# EAGLE board PCB (EAGLE 9.7.0)
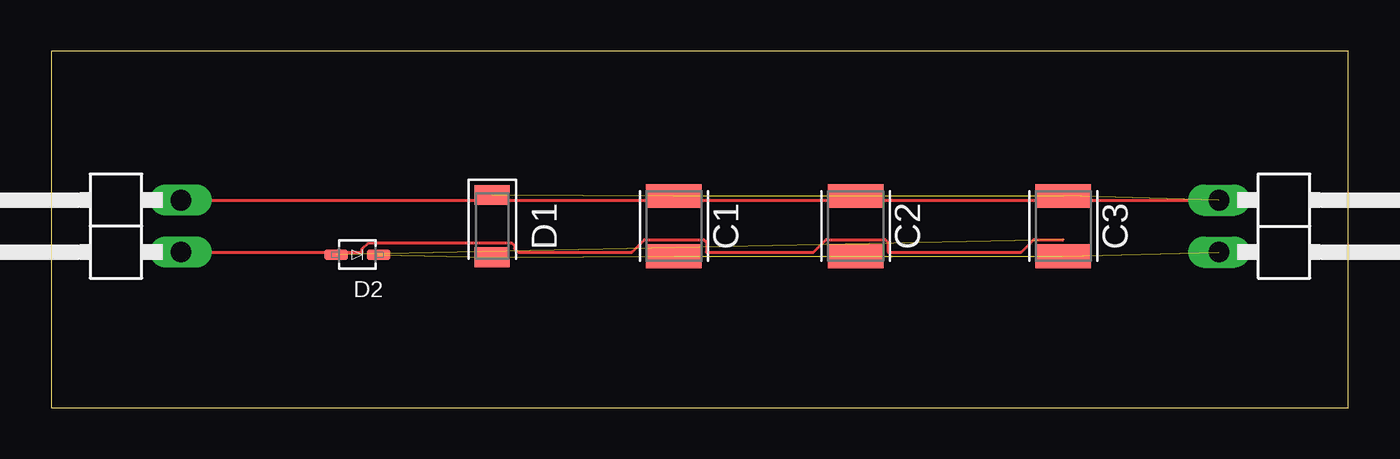
[diagram p0: board, top side]

Size 63.48 x 17.45 mm. Coordinates in mm from the lower left corner, seen from the top.
Outline: 0,0 63.48,0 63.48,17.45 0,17.45 0,0
Copper layers (1*16): Top / Bottom
Stack-up Default Layer Stack: Top SilkScreen Epoxy Ink / Top SolderMask SR:Green 0.0254mm Dk 4.3 / Top Surface Finish Lead-Free 0.02mm / Top CuFoil:007 0.035mm / Dielectric-1 User Defined 1.5mm / Bottom CuFoil:007 0.035mm / Bottom Surface Finish Lead-Free 0.02mm / Bottom SolderMask SR:Green 0.0254mm Dk 4.3 / Bottom SilkScreen Epoxy Ink
Design rules: minimum copper width 6mil, minimum drill size 0.35mm, copper clearance wire_polygon to wire_polygon 6mil, copper clearance wire_polygon to pad_smd 6mil, copper clearance wire_polygon to via 6mil, copper clearance pad_smd to pad_smd 6mil, copper clearance pad_smd to via 6mil, copper clearance via to via 6mil, copper clearance smd to pad (same net) 6mil, copper clearance smd to via (same net) 6mil, copper clearance smd to smd (same net) 6mil, dimension clearance 40mil, restrict clearance 0mil, via restrict clearance 0mil, drill distance 6mil, keepout clearance 0mil

## Footprints (pad centres in the part's own frame; a part is rotated, then mirrored left to right if it is on the bottom)
CAPC3225X135 = smd 1.165 x 2.715: 1 -1.475,0; 2 1.475,0
LEDC3216X110N_R = smd 0.962 x 1.712: 1 -1.525,0; 2 1.525,0
SOD-323 = smd 1.14 x 0.52: A 1.04,0; C -1.04,0
1X02/90 = drill 1.016 long: 1 -1.27,-3.81; 2 1.27,-3.81

## Placement (x,y rotation side)
C1  4.7u  [CAPC3225X135]  30.48,8.89 270 top
C2  4.7u  [CAPC3225X135]  39.37,8.89 270 top
C3  4.7u  [CAPC3225X135]  49.53,8.89 270 top
D1  LED_CHIPRED-3216  [LEDC3216X110N_R]  21.59,8.89 270 top
D2  1N4148WS  [SOD-323]  14.99,7.49 180 top
INPUT  PINHD-1X2/90  [1X02/90]  2.54,8.89 90 top
OUTPUT  PINHD-1X2/90  [1X02/90]  60.96,8.89 270 top

## Library data of the parts
C1-C3 = Capacitor; CATEGORY: Capacitor; PACKAGE_SIZE: 1210; PACKAGE_TYPE: Surface Mount; SUBCATEGORY: Ceramic Capacitors; TYPE: MLCC
D1 = Opto-Electronic; CATEGORY: Optoelectronics; COLOR: Red; DESCRIPTION: Chip LED Red 3216 (METRIC) Package 3.20 X 1.60 X 1.10 mm body; PACKAGE_SIZE: 3216 (METRIC); PACKAGE_TYPE: Surface Mount; SUBCATEGORY: LED; TYPE: Chip
D2 = Diodes; CREATED_BY: PCBLayout.com; DIGIKEY_PART_NUMBER: 1N4148WSFSTR-ND; MANUFACTURER: Diodes Incorporated; MPN: 1N4148WS; PACKAGE: SOD-323
INPUT OUTPUT = Connector; CATEGORY: Connectors; DESCRIPTION: Header-Right Angle-2 Position; PACKAGE_TYPE: Through Hole; PITCH: 0.100" (2.54mm); SUBCATEGORY: Headers; TYPE: Male Pins

## Nets
N$1: D2.A INPUT.1
N$2: C1.2 C2.2 C3.2 D1.2 D2.C OUTPUT.2
N$3: C1.1 C2.1 C3.1 D1.1 INPUT.2 OUTPUT.1

## Tracks (layer width: path | path; a pad name or v marks a point on that pad's centre or on a via)
N$1  (1 unrouted)
  Top 0.152: INPUT.1 15.23,7.62 15.23,7.77 15.53,8.07 22.54,8.07 22.68,7.94 22.68,7.8 22.86,7.62 28.42,7.62 29.03,8.23 31.93,8.23 32.07,8.09 32.07,7.62 37.31,7.62 37.92,8.23 40.82,8.23 40.96,8.09 40.96,7.62 47.47,7.62 48.08,8.23 49.53,8.23
N$2  (5 unrouted)
N$3  (4 unrouted)
  Top 0.152: INPUT.2 OUTPUT.1